# Altium PCB ScoreLED.PcbDoc (part 4 of 4)
Units mil, origin at the board's own origin, x right, y up, seen from the top; angles counter-clockwise.
Board outline 15000 x 7000 mil, 4 copper layers (Top Layer, Ground, Power, Bottom Layer); 605 components, 525 nets, 1780 pads, 554 vias.
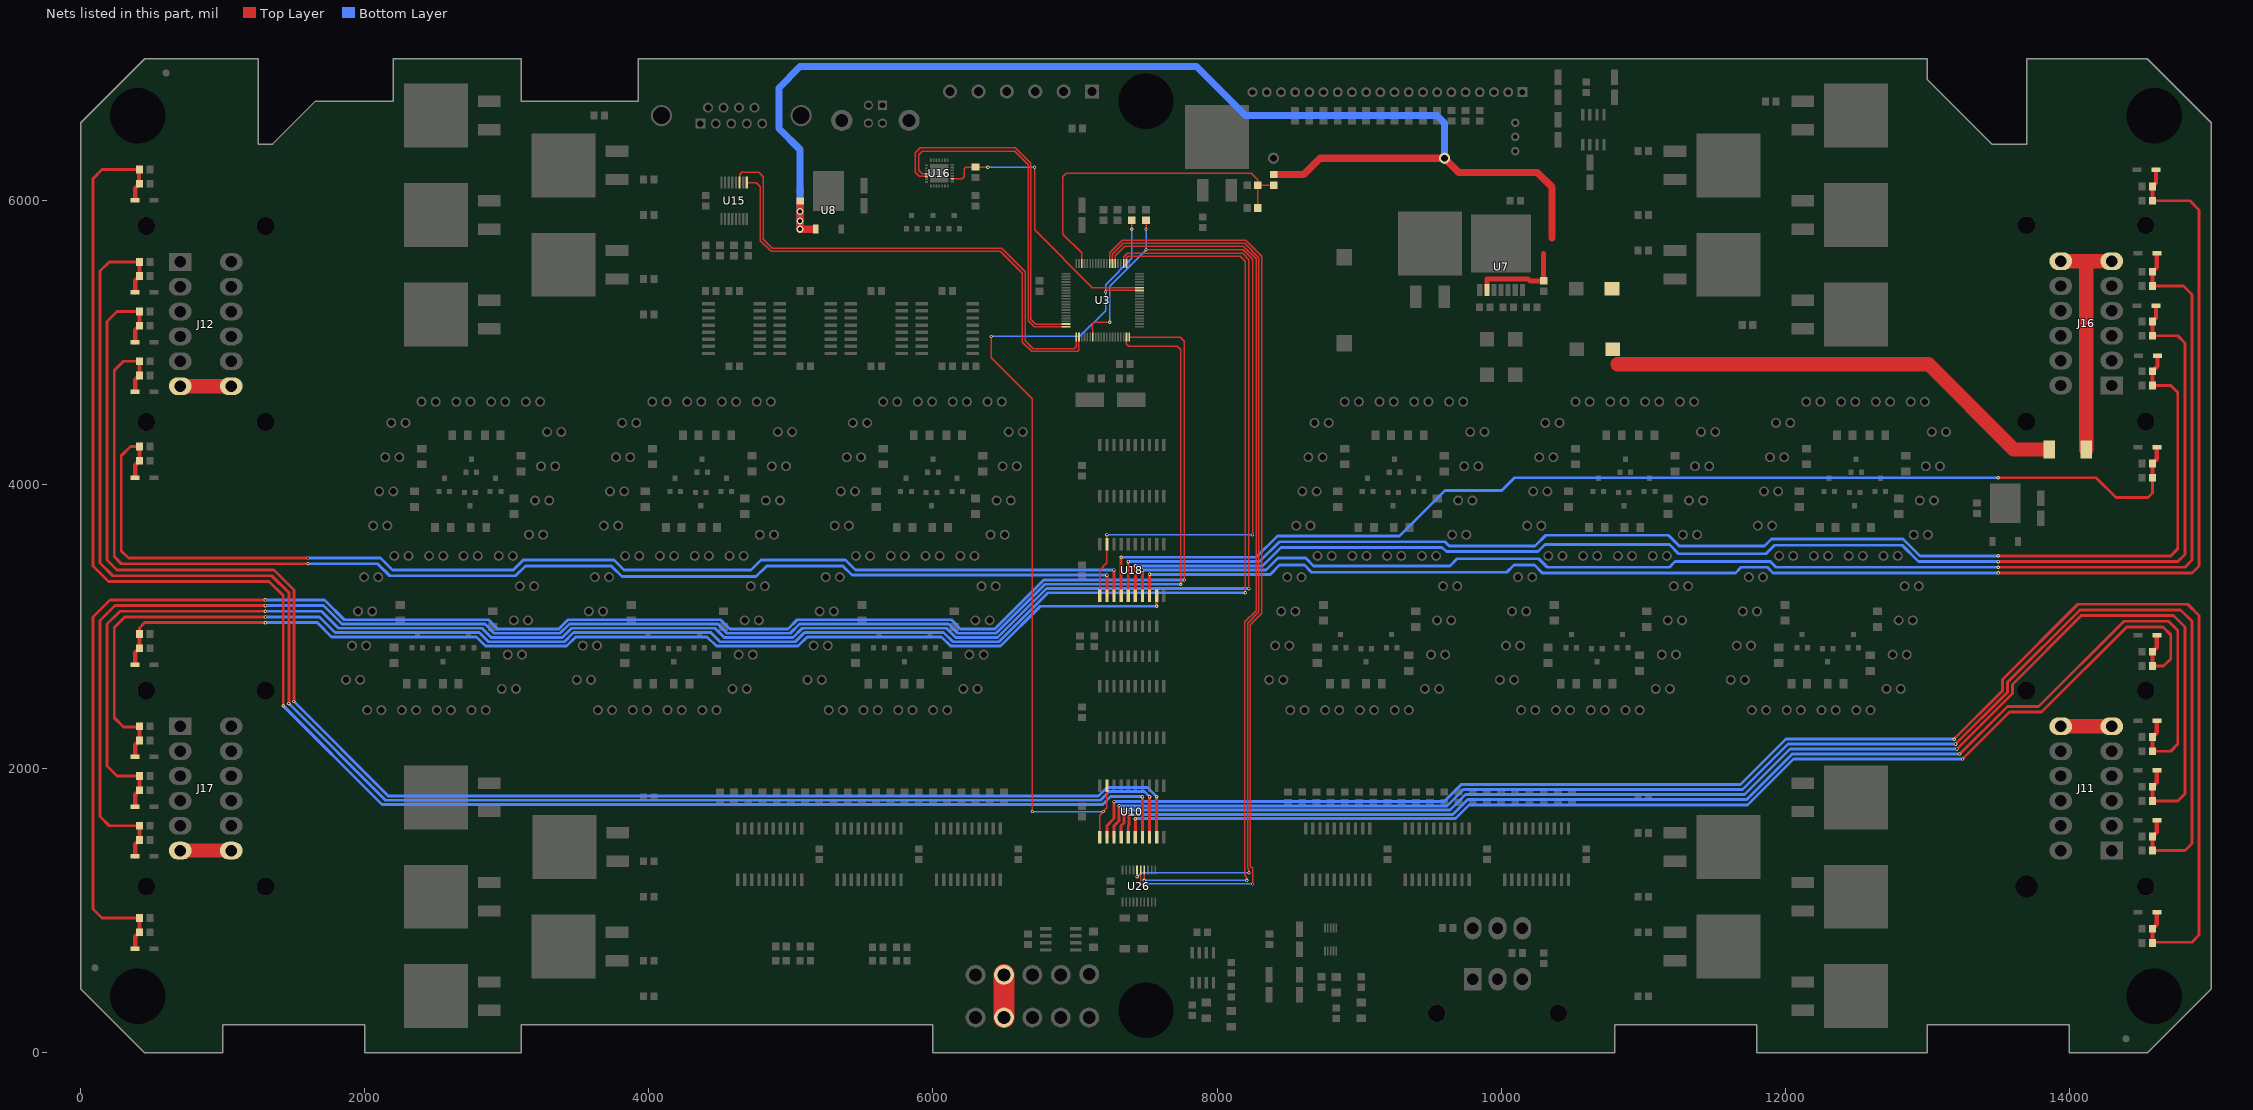
[diagram p6: the nets of this part, all layers, seen from the top]

## Via types
v1: diameter 24, hole 12, Top Layer to Bottom Layer, 468 vias
v2: diameter 50, hole 28, Top Layer to Bottom Layer, 86 vias

## Nets (pads, with @x,y where several pads share a name; then routed paths per layer and width w, separated by ;. In a path a pad name is that pad's centre, name@x,y a point inside that pad or via, vN(x,y) a via of type N, cw(c..) or ccw(c..) an arc to the next point about the centre after c; other vN are vias at no path point) (continued)
RTC_SCK: U3.6 U26.14 | length 6320.6
  Top Layer w10: U3.6@7283.58,5559.84 7283.58,5613.58 7351.25,5681.25 8186.25,5681.25 8275,5592.5 8275,3115 8195,3035 8195,1250 8210,1235 v1(8210,1215) ; v1(7488.39,1215) U26.14@7488.39,1287.2
  Bottom Layer w10: v1(7488.39,1215) v1(8210,1215)
RTC_SDI: U3.7 U26.16 | length 6384
  Top Layer w10: U3.7@7263.9,5559.84 7263.9,5624.21 7340.94,5701.25 8193.75,5701.25 8295,5600 8295,3105 8215,3025 8215,1305 8225,1295 v1(8225,1270) ; v1(7437.2,1240) U26.16@7437.2,1287.2
  Bottom Layer w10: v1(7437.2,1240) 7467.2,1270 v1(8225,1270)
RTC_SDO: U3.8 U26.15 | length 6571.1
  Top Layer w10: U3.8@7244.21,5559.84 7244.21,5634.21 7331.25,5721.25 8203.75,5721.25 8315,5610 8315,3095 8235,3015 8235,1315 8250,1300 v1(8250,1190) ; v1(7462.8,1190) U26.15@7462.8,1287.2
  Bottom Layer w10: v1(7462.8,1190) v1(8250,1190)
RXD_RS232: U3.42 U15.9 | length 3433
  Top Layer w10: U15.9@4689.57,6128.94 4756.06,6128.94 4785,6100 4785,5720 4860,5645 6475,5645 6630,5490 6630,5005 6695,4940 7020,4940 7027.68,4947.68 U3.42@7027.68,5040.16
RXD_USB: U3.39 U16.26 | length 2464.9
  Top Layer w10: U16.26@5954.45,6171.38 5903.62,6171.38 5875,6200 5875,6340 5910,6375 6580,6375 6690,6265 6690,5165 6722.32,5132.68 U3.39@6935.16,5132.68
SWITCH0: D3.2 R33.1 R34.1 U10.2 | length 11393.7
  Top Layer w20: U10.2@7225,1518.9 7225,1600 7275,1650 v1(7275,1770) ; v1(13190,2210) 13530,2550 13530,2630 14060,3160 14835,3160 14915,3080 14915,830 14865,780 R33.1@14587,780
  Top Layer w30: R33.1@14587,775 R34.1@14587,875 14616.93,904.93 D3.2@14616.93,990
  Bottom Layer w20: v1(7275,1770) 9600,1770 9720,1890 11685,1890 12005,2210 v1(13190,2210)
SWITCH1: D4.2 R35.1 R36.1 U10.3 | length 10527.5
  Top Layer w20: U10.3@7275,1518.9 7275,1600 7310,1635 v1(7310,1740) ; v1(13200,2175) 13565,2540 13565,2610 14075,3120 14785,3120 14865,3040 14865,1475 14815,1425 R35.1@14587,1425
  Top Layer w30: R35.1@14587,1425 R36.1@14587,1525 14616.93,1554.93 D4.2@14616.93,1640
  Bottom Layer w20: v1(7310,1740) 9620,1740 9735,1855 11700,1855 12020,2175 v1(13200,2175)
SWITCH2: D5.2 R37.1 R38.1 U10.4 | length 9959.2
  Top Layer w20: U10.4@7325,1518.9 7325,1600 7345,1620 7345,1680 v1(7345,1710) ; v1(13210,2140) 13600,2530 13600,2595 14085,3080 14735,3080 14815,3000 14815,1825 14765,1775 R37.1@14587,1775
  Top Layer w30: R37.1@14587,1775 R38.1@14587,1875 14616.93,1904.93 D5.2@14616.93,1990
  Bottom Layer w20: v1(7345,1710) 9640,1710 9750,1820 11715,1820 12035,2140 v1(13210,2140)
SWITCH3: D25.2 R39.1 R40.1 U10.5 | length 9364.5
  Top Layer w20: U10.5@7375,1518.9 7375,1600 7380,1605 7380,1635 v1(7380,1680) ; v1(13230,2105) 13565,2440 13785,2440 14385,3040 14700,3040 14765,2975 14765,2175 14715,2125 R39.1@14587,2125
  Top Layer w30: R39.1@14587,2125 R40.1@14587,2225 14616.93,2254.93 D25.2@14616.93,2340
  Bottom Layer w20: v1(7380,1680) 9660,1680 9765,1785 11730,1785 12050,2105 v1(13230,2105)
SWITCH4: D8.2 R41.1 R42.1 U10.6 | length 8544.2
  Top Layer w20: U10.6@7425,1518.9 v1@7425,1645 ; v1(13250,2070) 13580,2400 13805,2400 14405,3000 14660,3000 14715,2945 14715,2775 14665,2725 R41.1@14587,2725
  Top Layer w30: R41.1@14587,2725 R42.1@14587,2825 14616.93,2854.93 D8.2@14616.93,2940
  Bottom Layer w20: v1(7425,1650) 9680,1650 9775,1745 11735,1745 12060,2070 v1(13250,2070)
SWITCH5: D9.2 R43.1 R44.1 U10.7 | length 12153.1
  Top Layer w20: R43.1@413,6220 150,6220 85,6155 85,3430 195,3320 1325,3320 1425,3220 v1(1425,2445) ; U10.7@7475,1518.9 v1(7475,1805)
  Top Layer w30: D9.2@383.07,6005 383.07,6090.07 R44.1@413,6120 ; R44.1@410,6123 R43.1@410,6220
  Bottom Layer w20: v1(1425,2445) 2120,1750 7195,1750 7250,1805 v1(7475,1805)
SWITCH6: D10.2 R45.1 R46.1 U10.8 | length 11451.4
  Top Layer w20: R45.1@413,5570 200,5570 135,5505 135,3450 225,3360 1345,3360 1465,3240 v1(1465,2460) ; U10.8@7525,1518.9 v1(7525,1805)
  Top Layer w30: D10.2@383.07,5355 383.07,5440.07 R46.1@413,5470 R45.1@413,5570
  Bottom Layer w20: v1(1465,2460) 2145,1780 7180,1780 7240,1840 7490,1840 v1(7525,1805)
SWITCH7: D11.2 R47.1 R48.1 U10.9 | length 11039.7
  Top Layer w20: R47.1@413,5220 255,5220 185,5150 185,3470 255,3400 1360,3400 1500,3260 v1(1500,2475) ; U10.9@7575,1518.9 v1(7575,1805)
  Top Layer w30: D11.2@383.07,5005 383.07,5090.07 R48.1@413,5120 R47.1@413,5220
  Bottom Layer w20: v1(1500,2475) 2165,1810 7165,1810 7225,1870 7510,1870 v1(7575,1805)
SWITCH8: D6.2 R49.1 R50.1 U18.2 | length 9052.4
  Top Layer w20: R49.1@413,4870 300,4870 235,4805 235,3495 285,3445 v1(1600,3445) ; U18.2@7225,3218.9 v1(7225,3365)
  Top Layer w30: D6.2@383.07,4655 383.07,4740.07 R50.1@413,4770 R49.1@413,4870
  Bottom Layer w20: v1(1600,3445) 2090,3445 2175,3360 3060,3360 3130,3430 3735,3430 3810,3355 4755,3355 4830,3430 5365,3430 5430,3365 v1(7225,3365)
SWITCH9: D7.2 R51.1 R52.1 U18.3 | length 8400.3
  Top Layer w20: R51.1@413,4270 350,4270 285,4205 285,3535 335,3485 v1(1600,3485) ; U18.3@7275,3218.9 v1(7275,3400)
  Top Layer w30: D7.2@383.07,4050 383.07,4140.07 R52.1@413,4170 R51.1@413,4270
  Bottom Layer w20: v1(1600,3485) 2110,3485 2195,3400 3045,3400 3115,3470 3755,3470 3825,3400 4720,3400 4790,3470 5385,3470 5455,3400 v1(7275,3400)
SWITCH10: D15.2 R84.1 R85.1 U18.4 | length 8171.1
  Top Layer w20: U18.4@7325,3218.9 v1(7325,3490) ; v1(13500,4050) 14190,4050 14330,3910 14554,3910 14587,3943 R84.1@14587,4050
  Top Layer w30: R84.1@14587,4050 R85.1@14587,4150 14616.93,4179.93 D15.2@14616.93,4265
  Bottom Layer w20: v1(7325,3490) 8275,3490 8425,3640 9285,3640 9605,3960 10005,3960 10095,4050 v1(13500,4050)
SWITCH11: D16.2 R86.1 R87.1 U18.5 | length 9378
  Top Layer w20: U18.5@7375,3218.9 v1(7375,3460) ; v1(13500,3500) 14715,3500 14765,3550 14765,4650 14715,4700 R86.1@14587,4700
  Top Layer w30: R86.1@14587,4700 R87.1@14587,4800 14621.93,4834.93 D16.2@14621.93,4910
  Bottom Layer w20: v1(7375,3460) 8300,3460 8440,3600 9605,3600 9635,3570 10240,3570 10315,3645 11180,3645 11255,3570 11855,3570 11905,3620 12830,3620 12950,3500 v1(13500,3500)
SWITCH12: D17.2 R88.1 R89.1 U18.6 | length 9767.2
  Top Layer w20: U18.6@7425,3218.9 v1(7425,3430) ; v1(13500,3460) 14765,3460 14815,3510 14815,5000 14765,5050 R88.1@14587,5050
  Top Layer w30: R88.1@14587,5050 R89.1@14587,5150 14611.93,5174.93 D17.2@14611.93,5260
  Bottom Layer w20: v1(7425,3430) 8320,3430 8450,3560 9585,3560 9615,3530 10260,3530 10310,3580 11185,3580 11250,3515 11865,3515 11925,3575 12825,3575 12940,3460 v1(13500,3460)
SWITCH13: D18.2 R90.1 R91.1 U18.7 | length 10143.8
  Top Layer w20: U18.7@7475,3218.9 v1(7475,3400) ; v1(13500,3420) 14815,3420 14865,3470 14865,5340 14805,5400 R90.1@14587,5400
  Top Layer w30: R90.1@14587,5400 R91.1@14587,5500 14616.93,5529.93 D18.2@14616.93,5630
  Bottom Layer w20: v1(7475,3400) 8345,3400 8430,3485 8625,3485 8680,3430 9640,3430 9690,3480 10265,3480 10325,3420 11185,3420 11225,3460 11895,3460 11935,3420 v1(13500,3420)
SWITCH14: D19.2 R92.1 R93.1 U18.8 | length 10776.3
  Top Layer w20: U18.8@7525,3218.9 v1(7525,3370) ; v1(13500,3380) 14865,3380 14915,3430 14915,5935 14850,6000 R92.1@14587,6000
  Top Layer w30: R92.1@14587,6000 R93.1@14587,6100 14611.93,6124.93 D19.2@14611.93,6220
  Bottom Layer w20: v1(7525,3370) 8375,3370 8440,3435 8615,3435 8665,3385 10040,3385 10090,3435 10235,3435 10290,3380 11650,3380 11690,3420 11875,3420 11915,3380 v1(13500,3380)
SWITCH15: D20.2 R94.1 R95.1 U18.9 | length 7813.6
  Top Layer w20: R94.1@413,2950 413,2993 450,3030 v1(1300,3030) ; v1(7575,3145) U18.9@7575,3218.9
  Top Layer w30: D20.2@383.07,2735 383.07,2820.07 R95.1@413,2850 R94.1@413,2950
  Bottom Layer w20: v1(1300,3030) 1665,3030 1765,2930 2785,2930 2850,2865 3420,2865 3485,2930 4410,2930 4475,2865 5050,2865 5115,2930 6060,2930 6125,2865 6475,2865 6755,3145 v1(7575,3145)
SWITCH16: D21.2 R96.1 R97.1 U3.2 | length 12609.3
  Top Layer w10: U3.2@7362.32,5559.84 7362.32,5597.32 7375,5610 8165,5610 8200,5575 v1(8200,3240)
  Top Layer w20: R96.1@413,2295 300,2295 235,2360 235,2995 310,3070 v1(1300,3070)
  Top Layer w30: D21.2@383.07,2085 383.07,2170.07 R97.1@413,2200 R96.1@413,2300
  Bottom Layer w20: v1(1300,3070) 1680,3070 1790,2960 2805,2960 2870,2895 3405,2895 3470,2960 4435,2960 4500,2895 5030,2895 5090,2955 ; 5095,2960 6075,2960 6140,2895 6465,2895 6810,3240 v1(8200,3240)
SWITCH17: D22.2 R98.1 R99.1 U3.3 | length 13160.5
  Top Layer w10: U3.3@7342.64,5559.84 7342.64,5605.14 7367.5,5630 8180,5630 8225,5585 v1(8225,3270)
  Top Layer w20: R98.1@413,1950 255,1950 185,2020 185,3020 275,3110 v1(1300,3110)
  Top Layer w30: D22.2@383.07,1735 383.07,1820.07 R99.1@413,1850 R98.1@413,1950
  Bottom Layer w20: v1(1300,3110) 1695,3110 1815,2990 2825,2990 2890,2925 3390,2925 3455,2990 4465,2990 4530,2925 5015,2925 5080,2990 6095,2990 6160,2925 6455,2925 6800,3270 v1(8225,3270)
SWITCH18: D23.2 R100.1 R101.1 U3.59 | length 11995
  Top Layer w10: U3.59@7362.32,5040.16 7362.32,4992.68 7380,4975 7720,4975 7745,4950 v1(7745,3300)
  Top Layer w20: R100.1@413,1600 200,1600 135,1665 135,3045 240,3150 v1(1300,3150)
  Top Layer w30: D23.2@383.07,1385 383.07,1470.07 R101.1@413,1500 R100.1@413,1600
  Bottom Layer w20: v1(1300,3150) 1710,3150 1840,3020 2845,3020 2910,2955 3375,2955 3440,3020 4485,3020 4550,2955 4995,2955 5060,3020 6110,3020 6175,2955 6445,2955 6790,3300 v1(7745,3300)
SWITCH19: D24.2 R102.1 R103.1 U3.60 | length 12788
  Top Layer w10: U3.60@7382.01,5040.16 7739.84,5040.16 7770,5010 v1(7770,3330)
  Top Layer w20: R102.1@413,950 150,950 85,1015 85,3070 205,3190 v1(1300,3190)
  Top Layer w30: D24.2@383.07,735 383.07,820.07 R103.1@413,850 R102.1@413,950
  Bottom Layer w20: v1(1300,3190) 1715,3190 1855,3050 2870,3050 2935,2985 3365,2985 3430,3050 4505,3050 4570,2985 4980,2985 5045,3050 6130,3050 6195,2985 6435,2985 6780,3330 v1(7770,3330)
SWITCHES0-7: R55.2 U3.74 U10.1 U10.19 | length 6185.8
  Top Layer w10: v1(6410,5045) 6410,4895 6700,4605 v1(6700,1700) ; U10.1@7175,1518.9 7175,1675 7225,1725 U10.19@7225,1881.1 ; v1(7215,5360) 7223.9,5368.9 U3.74@7454.84,5368.9 ; v1(7400,5800) R55.2@7400,5863
  Bottom Layer w10: v1(6410,5045) 7035,5045 7215,5225 7215,5410 7400,5595 v1(7400,5800) ; v1(6700,1700) v1(7200,1700)
SWITCHES8-15: R104.2 U3.47 U18.1 U18.19 | length 5240.9
  Top Layer w10: U3.47@7126.1,5040.16 7126.1,5093.9 7120,5100 7120,5130 7135,5145 v1(7245,5145) ; U18.1@7175,3218.9 7175,3400 7225,3450 v1(7225,3650) ; v1(7500,5655) 8185,5655 8250,5590 v1(8250,3650) ; v1(7500,5800) R104.2@7500,5863
  Bottom Layer w10: v1(7225,3650) v1(8250,3650) ; v1(7245,5145) 7245,5400 v1(7500,5655) v1(7500,5800)
TXD_RS233: U3.41 U15.11 | length 3559
  Top Layer w10: U15.11@4638.39,6128.94 4638.39,6183.39 4655,6200 4775,6200 4805,6170 4805,5730 4870,5665 6485,5665 6650,5500 6650,5015 6705,4960 6995,4960 7007.99,4972.99 U3.41@7007.99,5040.16
TXD_USB: U3.40 U16.25 | length 2376.6
  Top Layer w10: U16.25@5954.45,6191.06 5923.94,6191.06 5900,6215 5900,6325 5925,6350 6575,6350 6670,6255 6670,5155 6712.01,5112.99 U3.40@6935.16,5112.99
USB_RST: R82.1 U3.75 U16.9 | length 1993.6
  Top Layer w10: U16.9@6135.55,6155.63 6205.63,6155.63 6220,6170 6220,6225 6232,6237 v1(6387,6237) ; v1@6715,6235 6715,5795 7121.42,5388.58 U3.75@7454.84,5388.58
  Bottom Layer w10: v1(6387,6237) v1(6715,6237)
VBAT: D1.A J2.1 J6.1 J11.6 J11.7 J12.6 J12.7 J16.6 J16.7 J17.6 J17.7 | length 3057
  Top Layer w100: J17.6@700,1425 J17.7@1059,1425 ; J12.6@700,4695 J12.7@1060,4695 ; J11.7@13941,2300 J11.6@14300,2300 ; J16.7@13941,5575 J16.6@14300,5575 ; D1.A@14120,4250 14120,5570
  Top Layer w150: J2.1@6500,250 J6.1@6500,550
VIN: C8.1 C9.1 C11.1 C17.1 D1.K R56.2 R67.1 U7.2 U8.1 | length 12919.2
  Top Layer w35: U7.2@9900,5372 9900,5450 10190,5450 10203,5437 C11.1@10300,5437 10300,5630
  Top Layer w50: C17.1@5065,5998 v2(5065.16,5800.16) U8.1@5165,5800.16 ; R56.2@8400,6184 8609,6184 8725,6300 R67.1@9602.36,6300 9702.36,6200 10255,6200 10360,6095 10360,5740
  Top Layer w100: 10820,4850 13010,4850 13610,4250 D1.K@13850,4250
  Bottom Layer w50: v2(5065.16,5800.16) 5065.16,6359.84 4915,6510 4915,6795 5065,6945 7855,6945 8200,6600 9549.72,6600 9602.36,6547.36 R67.1@9602.36,6300
  other v2: 5065.11,5859.14 5065.06,5924.14
VIN_SENSE_ANALOG: C31.1 R56.1 R57.2 U3.18 | length 2377.8
  Top Layer w10: U3.18@7047.36,5559.84 7047.36,5632.64 6915,5765 6915,6170 6940,6195 8240,6195 8287,6148 C31.1@8287,5950 ; R57.2@8287,6110 R56.1@8400,6110
pads on no net: D2.1 D12.2 D13.2 D14.2 FID1.1 FID2.1 FID3.1 J11.0 J12.0 J13.6 J14.0 J15.1 J15.4 J15.6 J15.7 J15.8 J15.9 J16.0 J17.0 J18.18 J19.0 J19.2 J19.5 M1.0 M2.0 M3.0 M4.0 M5.0 M6.0 U2.3 U2.4 U2.5 U2.6 U2.11 U2.12 U2.13 U2.14 U3.4 U3.5 U3.16 U4.7 U5.5 U6.3 U6.4 U6.5 U6.6 U6.11 U6.12 U6.13 U6.14 U7.5 U7.8 U9.3 U9.4 U9.5 U9.6 U9.11 U9.12 U9.13 U9.14 U13.3 U13.4 U13.5 U13.6 U13.11 U13.12 U13.13 U13.14 U14.12 U16.0 U16.1 U16.2 U16.10 U16.11 U16.12 U16.13 U16.14 U16.15 U16.16 U16.17 U16.18 U16.19 U16.20 U16.21 U16.22 U16.23 U16.24 U16.27 U16.28 U17.1 U17.6 U17.7 U26.4 U26.6 U26.7 U26.8 U26.9 U26.13 U26.18 U26.19 Y2.0 Y2.2 Y2.3

## Polygon pours and split planes (outlines as drawn)
"+3.3 VDC" on Top Layer "3.3VDC" (solid, remove dead copper, pour order 1001): 5300,5870 5300,5735 5600,5735 5600,6035 5455,6035 5455,5870
GND on Top Layer "3.3VDC GND" (solid, remove dead copper, pour order 1000): 5100,6300 5100,5870 5450,5870 5450,6300
"+8 VDC" on Top Layer "8 VDC" (solid, remove dead copper, pour order 1001): 8700,5250 8700,4650 10300,4650 10300,4900 10290,4900 10250,4900 10215,4900 9200,4900 9200,5250
NetC15_2 on Top Layer "C15_2" (solid, remove dead copper, pour order 1002): 8700,5250 8700,5800 8900,6000 9750,6000 9750,5415 9200,5415 9200,5250
GND on Top Layer "GND" (solid, remove dead copper, pour order 1003): 9200,5400 9200,4900 10300,4900 10300,4650 10650,4650 10650,5600 10350,5600 10350,5400 9800,5400 9500,5400
VIN on Top Layer "Vin" (solid, remove dead copper, pour order 1004): 10650,4650 11000,4650 11000,5600 10825,5600 10825,5750 10775,5800 10260,5800 10260,5600 10350,5600 10650,5600
VBAT on Bottom Layer "Vbat" (solid, remove dead copper, pour order 1000): 0,7000 0,0 15000,0 15000,7000 13800,7000 13800,800 1200,800 1200,7000
no net on Power (split plane): 11789.55,6554.33 11160.45,6554.33 11336.79,6730.67 11613.21,6730.67
no net on Power (split plane): 6595.67,6424.33 6009.33,6424.33 6009.33,6545.67 6595.67,6545.67
"+3.3 VDC" on Power (split plane): 14979.61,6541.55 14979.61,458.45 14541.55,20.39 14020.39,20.39 14020.39,200 14018.84,207.8 14014.42,214.42 14007.8,218.84 14000,220.39 13000,220.39 12992.2,218.84 12985.58,214.42 12981.16,207.8 12979.61,200 12979.61,20.39 11820.39,20.39 11820.39,200 11818.84,207.8 11814.42,214.42 11807.8,218.84 11800,220.39 10800,220.39 10792.2,218.84 10785.58,214.42 10781.16,207.8 10779.61,200 10779.61,20.39 6020.39,20.39 6020.39,200 6018.84,207.8 6014.42,214.42 6007.8,218.84 6000,220.39 3100,220.39 3092.2,218.84 3085.58,214.42 3081.16,207.8 3079.61,200 3079.61,20.39 2020.39,20.39 2020.39,200 2018.84,207.8 2014.42,214.42 2007.8,218.84 2000,220.39 1000,220.39 992.2,218.84 985.58,214.42 981.16,207.8 979.61,200 979.61,20.39 458.45,20.39 20.39,458.45 20.39,6541.55 458.45,6979.61 1229.61,6979.61 1229.61,6400 1231.16,6392.2 1235.58,6385.58 1242.2,6381.16 1250,6379.61 1350,6379.61 1357.8,6381.16 1364.42,6385.58 1658.45,6679.61 2200,6679.61 2207.8,6681.16 2214.42,6685.58 2218.84,6692.2 2220.39,6700 2220.39,6979.61 3079.61,6979.61 3079.61,6700 3081.16,6692.2 3085.58,6685.58 3092.2,6681.16 3100,6679.61 3925,6679.61 3932.8,6681.16 3939.42,6685.58 3943.84,6692.2 3945.39,6700 3945.39,6979.61 12979.61,6979.61 12979.61,6855 12981.16,6847.2 12985.58,6840.58 13440.58,6385.58 13447.2,6381.16 13455,6379.61 13700,6379.61 13707.8,6381.16 13714.42,6385.58 13718.84,6392.2 13720.39,6400 13720.39,6979.61 14541.55,6979.61
no net on Power (split plane): 7695.67,6254.33 6819.33,6254.33 6819.33,6445.67 7695.67,6445.67
no net on Power (split plane): 1654.33,6010.45 1654.33,6345.67 1989.55,6345.67
no net on Power (split plane): 11010.67,6116.79 10848.21,5954.33 10610.45,5954.33 10906.79,6250.67 11010.67,6250.67
no net on Power (split plane): 11275.67,5949.33 11139.33,5949.33 11139.33,6065.67 11275.67,6065.67
no net on Power (split plane): 6595.67,5804.33 6454.33,5804.33 6454.33,6145.67 6595.67,6145.67
no net on Power (split plane): 11295.67,5250 11296.94,5246.94 11300,5245.67 11595.67,5245.67 11595.67,4954.33 11054.33,4954.33 11054.33,5340.67 11295.67,5340.67
no net on Power (split plane): 11984.07,4710.2 11766.32,4710.2 11801.79,4745.67 12019.55,4745.67
no net on Power (split plane): 8435.67,4710.2 8364.33,4710.2 8364.33,4745.67 8435.67,4745.67
no net on Power (split plane): 3995.67,4756.79 3949.07,4710.2 3395.93,4710.2 3303.06,4803.06 3300,4804.33 3104.33,4804.33 3104.33,5095.67 3995.67,5095.67
no net on Power (split plane): 2245.67,4654.33 1810.2,4654.33 1810.2,4689.8 2245.67,4689.8
no net on Power (split plane): 2245.67,4948.21 2245.67,4710.2 1800,4710.2 1796.1,4709.42 1792.79,4707.21 1790.58,4703.9 1789.8,4700 1789.8,4654.33 1654.33,4654.33 1654.33,4848.21 1851.79,5045.67 2148.21,5045.67
no net on Power (split plane): 5495.67,4604.33 5004.33,4604.33 5004.33,4689.8 5495.67,4689.8
no net on Power (split plane): 3843.21,4604.33 3501.79,4604.33 3416.32,4689.8 3928.68,4689.8
"+8 VDC" on Power (split plane): 6789.8,2310.2 1810.2,2310.2 1810.2,4645.67 2250,4645.67 2253.06,4646.94 2254.33,4650 2254.33,4689.8 3404.07,4689.8 3496.94,4596.94 3500,4595.67 3845,4595.67 3848.06,4596.94 3940.93,4689.8 4995.67,4689.8 4995.67,4600 4996.94,4596.94 5000,4595.67 5500,4595.67 5503.06,4596.94 5504.33,4600 5504.33,4689.8 6789.8,4689.8
no net on Power (split plane): 11828.21,4554.33 11610.45,4554.33 11745.93,4689.8 11963.68,4689.8
no net on Power (split plane): 8435.67,4479.33 8364.33,4479.33 8364.33,4689.8 8435.67,4689.8
"+8 VDC" on Power (split plane): 10289.8,4700 10290.58,4696.1 10292.79,4692.79 10296.1,4690.58 10300,4689.8 11733.68,4689.8 11596.94,4553.06 11595.67,4550 11596.94,4546.94 11600,4545.67 11830,4545.67 11833.06,4546.94 11975.93,4689.8 13189.8,4689.8 13189.8,3759.33 13125,3759.33 13121.94,3758.06 13120.67,3755 13120.67,3580 13121.94,3576.94 13125,3575.67 13189.8,3575.67 13189.8,2310.2 12954.33,2310.2 12954.33,2400 12953.06,2403.06 12950,2404.33 12750,2404.33 12746.94,2403.06 12745.67,2400 12745.67,2310.2 11704.33,2310.2 11704.33,2350 11703.06,2353.06 11700,2354.33 11650,2354.33 11646.94,2353.06 11604.07,2310.2 8210.2,2310.2 8210.2,4689.8 8355.67,4689.8 8355.67,4475 8356.94,4471.94 8360,4470.67 8440,4470.67 8443.06,4471.94 8444.33,4475 8444.33,4689.8 8600,4689.8 8603.9,4690.58 8607.21,4692.79 8609.42,4696.1 8610.2,4700 8610.2,4889.8 10289.8,4889.8
no net on Power (split plane): 7595.67,4394.33 7061.79,4394.33 7010.45,4445.67 7595.67,4445.67
no net on Power (split plane): 10190.67,4359.33 9989.33,4359.33 9989.33,4445 9988.06,4448.06 9879.33,4556.79 9879.33,4595.67 10190.67,4595.67
no net on Power (split plane): 10665.67,4304.33 10621.79,4304.33 10539.33,4386.79 10539.33,4440.67 10665.67,4440.67
no net on Power (split plane): 9040.67,4304.33 8986.79,4304.33 8904.33,4386.79 8904.33,4450.67 9040.67,4450.67
no net on Power (split plane): 12295.67,4274.33 12229.33,4274.33 12229.33,4330 12228.06,4333.06 12154.33,4406.79 12154.33,4435.67 12295.67,4435.67
no net on Power (split plane): 13430.67,4233.21 13430.67,4174.33 13239.33,4174.33 13239.33,4345.67 13318.21,4345.67
no net on Power (split plane): 8865.67,3689.33 8759.33,3689.33 8759.33,3770.67 8865.67,3770.67
no net on Power (split plane): 5615.67,3676.79 5598.21,3659.33 5504.33,3659.33 5504.33,3775.67 5615.67,3775.67
no net on Power (split plane): 2395.67,3589.33 2351.79,3589.33 2304.33,3636.79 2304.33,3695.67 2395.67,3695.67
no net on Power (split plane): 13275.67,3663.21 13275.67,3584.33 13210.2,3584.33 13210.2,3728.68
no net on Power (split plane): 13189.8,3749.07 13189.8,3584.33 13129.33,3584.33 13129.33,3750.67 13188.21,3750.67
no net on Power (split plane): 3595.67,3584.33 3454.33,3584.33 3454.33,3635.67 3595.67,3635.67
no net on Power (split plane): 1695.67,3554.33 1254.33,3554.33 1254.33,3895.67 1695.67,3895.67
no net on Power (split plane): 5855.67,3254.33 5720,3254.33 5716.94,3253.06 5656.94,3193.06 5655.67,3190 5655.67,3104.33 5604.33,3104.33 5604.33,3295.67 5855.67,3295.67
no net on Power (split plane): 4045.67,3104.33 3959.33,3104.33 3959.33,3240.67 4045.67,3240.67
no net on Power (split plane): 2435.67,3104.33 2344.33,3104.33 2344.33,3260.67 2435.67,3260.67
no net on Power (split plane): 12545.67,3004.33 12404.33,3004.33 12404.33,3145.67 12545.67,3145.67
no net on Power (split plane): 12150.67,3004.33 12089.33,3004.33 12089.33,3195.67 12150.67,3195.67
no net on Power (split plane): 10945.67,3004.33 10754.33,3004.33 10754.33,3078.21 10801.79,3125.67 10945.67,3125.67
no net on Power (split plane): 10545.67,3004.33 10454.33,3004.33 10454.33,3195.67 10545.67,3195.67
no net on Power (split plane): 9295.67,3004.33 9154.33,3004.33 9154.33,3125.67 9295.67,3125.67
no net on Power (split plane): 8920.67,3004.33 8854.33,3004.33 8854.33,3195.67 8920.67,3195.67
no net on Power (split plane): 8695.67,2569.33 8559.33,2569.33 8559.33,2680.67 8695.67,2680.67
no net on Power (split plane): 3830.67,2569.33 3704.33,2569.33 3704.33,2660.67 3830.67,2660.67
no net on Power (split plane): 5455.67,2559.33 5329.33,2559.33 5329.33,2655.67 5455.67,2655.67
no net on Power (split plane): 2205.67,2559.33 2064.33,2559.33 2064.33,2680.67 2205.67,2680.67
no net on Power (split plane): 11945.67,2554.33 11854.33,2554.33 11854.33,2645.67 11945.67,2645.67
no net on Power (split plane): 10345.67,2554.33 10204.33,2554.33 10204.33,2645.67 10345.67,2645.67
no net on Power (split plane): 11198.21,2354.33 11104.33,2354.33 11104.33,2415.67 11259.55,2415.67
no net on Power (split plane): 13645.67,3104.33 13400,3104.33 13396.94,3103.06 13395.67,3100 13395.67,2501.79 13210.2,2316.32 13210.2,3295.67 13645.67,3295.67
no net on Power (split plane): 12945.67,2310.2 12754.33,2310.2 12754.33,2395.67 12945.67,2395.67
no net on Power (split plane): 11695.67,2310.2 11616.32,2310.2 11651.79,2345.67 11695.67,2345.67
no net on Power (split plane): 12945.67,2254.33 12754.33,2254.33 12754.33,2289.8 12945.67,2289.8
no net on Power (split plane): 11695.67,2154.33 11460.45,2154.33 11595.93,2289.8 11695.67,2289.8
no net on Power (split plane): 2190.67,1945.45 1960.45,2175.67 2190.67,2175.67
no net on Power (split plane): 13155.67,1904.33 12834.33,1904.33 12834.33,2015.67 13155.67,2015.67
no net on Power (split plane): 3249.55,1904.33 3131.79,1904.33 2943.06,2093.06 2940,2094.33 2504.33,2094.33 2504.33,2165.67 2988.21,2165.67
no net on Power (split plane): 8410.67,1839.33 8294.33,1839.33 8294.33,2060.67 8410.67,2060.67
no net on Power (split plane): 13033.21,1554.33 12839.33,1554.33 12839.33,1695.67 13174.55,1695.67
no net on Power (split plane): 10850.67,1601.79 10763.21,1514.33 10696.79,1514.33 10643.06,1568.06 10640,1569.33 10584.33,1569.33 10584.33,1645.67 10850.67,1645.67
no net on Power (split plane): 11015.67,1249.33 10864.33,1249.33 10864.33,1435.67 11015.67,1435.67
no net on Power (split plane): 12973.21,1204.33 12834.33,1204.33 12834.33,1345.67 13114.55,1345.67
no net on Power (split plane): 10640.67,974.33 10504.33,974.33 10504.33,1125.67 10640.67,1125.67
no net on Power (split plane): 2096.94,996.94 2100,995.67 2195.67,995.67 2195.67,864.33 2041.79,864.33 1904.33,1001.79 1904.33,1189.55
no net on Power (split plane): 4545.67,1160 4546.94,1156.94 4795.67,908.21 4795.67,854.33 4304.33,854.33 4304.33,1595 4304.05,1595.67 4545.67,1595.67
GND on Ground (split plane): 11789.55,6554.33 11160.45,6554.33 11336.79,6730.67 11613.21,6730.67
GND on Ground (split plane): 6595.67,6424.33 6009.33,6424.33 6009.33,6545.67 6595.67,6545.67
GND on Ground (split plane): 152 vertices, not listed, extent 20.39,20.39 14979.61,6979.61
GND on Ground (split plane): 7695.67,6254.33 6819.33,6254.33 6819.33,6445.67 7695.67,6445.67
GND on Ground (split plane): 1654.33,6010.45 1654.33,6345.67 1989.55,6345.67
GND on Ground (split plane): 11010.67,6116.79 10848.21,5954.33 10610.45,5954.33 10906.79,6250.67 11010.67,6250.67
GND on Ground (split plane): 11275.67,5949.33 11139.33,5949.33 11139.33,6065.67 11275.67,6065.67
GND on Ground (split plane): 6595.67,5804.33 6454.33,5804.33 6454.33,6145.67 6595.67,6145.67
GND on Ground (split plane): 11295.67,5250 11296.94,5246.94 11300,5245.67 11595.67,5245.67 11595.67,4954.33 11054.33,4954.33 11054.33,5340.67 11295.67,5340.67
GND on Ground (split plane): 2245.67,4948.21 2245.67,4654.33 1654.33,4654.33 1654.33,4848.21 1851.79,5045.67 2148.21,5045.67
GND on Ground (split plane): 5495.67,4604.33 5004.33,4604.33 5004.33,4695.67 5495.67,4695.67
GND on Ground (split plane): 3995.67,4756.79 3843.21,4604.33 3501.79,4604.33 3303.06,4803.06 3300,4804.33 3104.33,4804.33 3104.33,5095.67 3995.67,5095.67
GND on Ground (split plane): 11828.21,4554.33 11610.45,4554.33 11801.79,4745.67 12019.55,4745.67
GND on Ground (split plane): 8435.67,4479.33 8364.33,4479.33 8364.33,4745.67 8435.67,4745.67
GND on Ground (split plane): 7595.67,4394.33 7110.2,4394.33 7110.2,4445.67 7595.67,4445.67
GND on Ground (split plane): 7089.8,4394.33 7061.79,4394.33 7010.45,4445.67 7089.8,4445.67
GND on Ground (split plane): 10190.67,4359.33 9989.33,4359.33 9989.33,4445 9988.06,4448.06 9879.33,4556.79 9879.33,4595.67 10190.67,4595.67
GND on Ground (split plane): 10665.67,4304.33 10621.79,4304.33 10539.33,4386.79 10539.33,4440.67 10665.67,4440.67
GND on Ground (split plane): 9040.67,4304.33 8986.79,4304.33 8904.33,4386.79 8904.33,4450.67 9040.67,4450.67
GND on Ground (split plane): 12295.67,4274.33 12229.33,4274.33 12229.33,4330 12228.06,4333.06 12154.33,4406.79 12154.33,4435.67 12295.67,4435.67
GND on Ground (split plane): 13430.67,4233.21 13430.67,4174.33 13239.33,4174.33 13239.33,4345.67 13318.21,4345.67
GND on Ground (split plane): 8865.67,3689.33 8759.33,3689.33 8759.33,3770.67 8865.67,3770.67
GND on Ground (split plane): 5615.67,3676.79 5598.21,3659.33 5504.33,3659.33 5504.33,3775.67 5615.67,3775.67
GND on Ground (split plane): 2395.67,3589.33 2351.79,3589.33 2304.33,3636.79 2304.33,3695.67 2395.67,3695.67
GND on Ground (split plane): 13275.67,3663.21 13275.67,3584.33 13129.33,3584.33 13129.33,3750.67 13188.21,3750.67
GND on Ground (split plane): 3595.67,3584.33 3454.33,3584.33 3454.33,3635.67 3595.67,3635.67
GND on Ground (split plane): 1695.67,3554.33 1254.33,3554.33 1254.33,3895.67 1695.67,3895.67
GND on Ground (split plane): 5855.67,3254.33 5720,3254.33 5716.94,3253.06 5656.94,3193.06 5655.67,3190 5655.67,3104.33 5604.33,3104.33 5604.33,3295.67 5855.67,3295.67
GND on Ground (split plane): 4045.67,3104.33 3959.33,3104.33 3959.33,3240.67 4045.67,3240.67
GND on Ground (split plane): 2435.67,3104.33 2344.33,3104.33 2344.33,3260.67 2435.67,3260.67
GND on Ground (split plane): 12545.67,3004.33 12404.33,3004.33 12404.33,3145.67 12545.67,3145.67
GND on Ground (split plane): 12150.67,3004.33 12089.33,3004.33 12089.33,3195.67 12150.67,3195.67
GND on Ground (split plane): 10945.67,3004.33 10754.33,3004.33 10754.33,3078.21 10801.79,3125.67 10945.67,3125.67
GND on Ground (split plane): 10545.67,3004.33 10454.33,3004.33 10454.33,3195.67 10545.67,3195.67
GND on Ground (split plane): 9295.67,3004.33 9154.33,3004.33 9154.33,3125.67 9295.67,3125.67
GND on Ground (split plane): 8920.67,3004.33 8854.33,3004.33 8854.33,3195.67 8920.67,3195.67
GND on Ground (split plane): 8695.67,2569.33 8559.33,2569.33 8559.33,2680.67 8695.67,2680.67
GND on Ground (split plane): 3830.67,2569.33 3704.33,2569.33 3704.33,2660.67 3830.67,2660.67
GND on Ground (split plane): 5455.67,2559.33 5329.33,2559.33 5329.33,2655.67 5455.67,2655.67
GND on Ground (split plane): 2205.67,2559.33 2064.33,2559.33 2064.33,2680.67 2205.67,2680.67
GND on Ground (split plane): 11945.67,2554.33 11854.33,2554.33 11854.33,2645.67 11945.67,2645.67
GND on Ground (split plane): 10345.67,2554.33 10204.33,2554.33 10204.33,2645.67 10345.67,2645.67
GND on Ground (split plane): 11198.21,2354.33 11104.33,2354.33 11104.33,2415.67 11259.55,2415.67
GND on Ground (split plane): 13645.67,3104.33 13400,3104.33 13396.94,3103.06 13395.67,3100 13395.67,2501.79 13204.33,2310.45 13204.33,2350 13204.33,3295.67 13645.67,3295.67
GND on Ground (split plane): 12945.67,2254.33 12754.33,2254.33 12754.33,2395.67 12945.67,2395.67
GND on Ground (split plane): 11695.67,2154.33 11460.45,2154.33 11651.79,2345.67 11695.67,2345.67
GND on Ground (split plane): 2190.67,1945.45 1960.45,2175.67 2190.67,2175.67
GND on Ground (split plane): 13155.67,1904.33 12834.33,1904.33 12834.33,2015.67 13155.67,2015.67
GND on Ground (split plane): 3249.55,1904.33 3131.79,1904.33 2943.06,2093.06 2940,2094.33 2504.33,2094.33 2504.33,2165.67 2988.21,2165.67
GND on Ground (split plane): 8410.67,1839.33 8294.33,1839.33 8294.33,2060.67 8410.67,2060.67
GND on Ground (split plane): 13033.21,1554.33 12839.33,1554.33 12839.33,1695.67 13174.55,1695.67
GND on Ground (split plane): 10850.67,1601.79 10763.21,1514.33 10696.79,1514.33 10643.06,1568.06 10640,1569.33 10584.33,1569.33 10584.33,1645.67 10850.67,1645.67
GND on Ground (split plane): 11015.67,1249.33 10864.33,1249.33 10864.33,1435.67 11015.67,1435.67
GND on Ground (split plane): 12973.21,1204.33 12834.33,1204.33 12834.33,1345.67 13114.55,1345.67
GND on Ground (split plane): 10640.67,974.33 10504.33,974.33 10504.33,1125.67 10640.67,1125.67
GND on Ground (split plane): 2096.94,996.94 2100,995.67 2195.67,995.67 2195.67,864.33 2041.79,864.33 1904.33,1001.79 1904.33,1189.55
GND on Ground (split plane): 4545.67,1160 4546.94,1156.94 4795.67,908.21 4795.67,854.33 4304.33,854.33 4304.33,1595 4304.05,1595.67 4545.67,1595.67

## Keep-outs
Keep-Out Layer:
  lines w8: 4300,1595 4300,850 4800,850 4800,910 4550,1160 4550,1600 4300,1600 ; 9875,4600 10195,4600 10195,4355 9985,4355 9985,4445 9875,4555 9875,4605 ; 0,450 450,0 1000,0 1000,200 2000,200 2000,0 3100,0 3100,200 6000,200 6000,0 10800,0 10800,200 11800,200 11800,0 13000,0 13000,200 14000,200 14000,0 14550,0 15000,450 15000,6550 14550,7000 13700,7000 13700,6400 13455,6400 13000,6855 13000,7000 3925,7000 3925,6700 3100,6700 3100,7000 2200,7000 2200,6700 1650,6700 1350,6400 1250,6400 1250,7000 450,7000 0,6550 0,450 ; 1250,3550 1700,3550 1700,3900 1250,3900 1250,3550 ; 1650,4650 1650,4850 1850,5050 2150,5050 2250,4950 2250,4650 1650,4650 ; 1650,6000 2000,6350 1650,6350 1650,6000 ; 1900,1000 1900,1200 2100,1000 2200,1000 2200,860 2040,860 1900,1000 ; 1950,2180 2000,2180 2195,2180 2195,1935 1950,2180 ; 2060,2555 2210,2555 2210,2685 2060,2685 2060,2555 ; 2300,3635 2350,3585 2400,3585 2400,3700 2300,3700 2300,3635 ; 2340,3100 2440,3100 2440,3265 2340,3265 2340,3100 ; 2500,2090 2940,2090 3130,1900 3260,1900 2990,2170 2500,2170 2500,2090 ; 3100,4800 3300,4800 3500,4600 3845,4600 4000,4755 4000,5100 3100,5100 3100,4800 ; 3450,3580 3600,3580 3600,3640 3450,3640 3450,3580 ; 3700,2565 3835,2565 3835,2665 3700,2665 3700,2565 ; 3955,3100 4050,3100 4050,3245 3955,3245 3955,3100 ; 5000,4600 5500,4600 5500,4700 5000,4700 5000,4600 ; 5325,2555 5460,2555 5460,2660 5325,2660 5325,2555 ; 5500,3655 5600,3655 5620,3675 5620,3780 5500,3780 5500,3655 ; 5600,3100 5660,3100 5660,3190 5720,3250 5860,3250 5860,3300 5600,3300 5600,3100 ; 6450,5800 6600,5800 6600,6150 6450,6150 6450,5800 ; 6815,6250 7700,6250 7700,6450 6815,6450 6815,6250 ; 7000,4450 7060,4390 7600,4390 7600,4450 7000,4450 ; 8290,1835 8415,1835 8415,2065 8290,2065 8290,1835 ; 8360,4475 8440,4475 8440,4750 8360,4750 8360,4475 ; 8555,2565 8700,2565 8700,2685 8555,2685 8555,2565 ; 8755,3685 8870,3685 8870,3775 8755,3775 8755,3685 ; 8850,3000 8925,3000 8925,3200 8850,3200 8850,3000 ; 8900,4385 8985,4300 9045,4300 9045,4455 8900,4455 8900,4385 ; 9150,3000 9300,3000 9300,3130 9150,3130 9150,3000 ; 10200,2550 10350,2550 10350,2650 10200,2650 10200,2550 ; 10450,3000 10550,3000 10550,3200 10450,3200 10450,3000 ; 10500,970 10645,970 10645,1130 10500,1130 10500,970 ; 10535,4385 10620,4300 10670,4300 10670,4445 10535,4445 10535,4385 ; 10580,1565 10580,1650 10855,1650 10855,1600 10765,1510 10695,1510 10640,1565 10580,1565 ; 10600,5950 10905,6255 11015,6255 11015,6115 10850,5950 10600,5950 ; 10750,3000 10750,3080 10800,3130 10950,3130 10950,3000 10750,3000 ; 10860,1245 11020,1245 11020,1440 10860,1440 10860,1245 ; 11050,4950 11050,5345 11300,5345 11300,5250 11600,5250 11600,4950 11050,4950 ; 11100,2350 11200,2350 11270,2420 11100,2420 11100,2350 ; 11135,5945 11280,5945 11280,6070 11135,6070 11135,5945 ; 11150,6550 11335,6735 11615,6735 11800,6550 11150,6550 ; 11450,2150 11650,2350 11700,2350 11700,2150 11450,2150 ; 11600,4550 11800,4750 12030,4750 11830,4550 11600,4550 ; 11850,2550 11950,2550 11950,2650 11850,2650 11850,2550 ; 12085,3000 12155,3000 12155,3200 12085,3200 12085,3000 ; 12150,4405 12150,4440 12300,4440 12300,4270 12225,4270 12225,4330 12150,4405 ; 12400,3000 12550,3000 12550,3150 12400,3150 12400,3000 ; 12750,2250 12950,2250 12950,2400 12750,2400 12750,2250 ; 12830,1200 12975,1200 13125,1350 12830,1350 12830,1200 ; 12830,1900 13160,1900 13160,2020 12830,2020 12830,1900 ; 12835,1550 13035,1550 13185,1700 12835,1700 12835,1550 ; 13125,3580 13280,3580 13280,3665 13190,3755 13125,3755 13125,3580 ; 13200,2300 13200,2350 13200,3300 13650,3300 13650,3100 13400,3100 13400,2500 13200,2300 ; 13235,4170 13435,4170 13435,4235 13320,4350 13235,4350 13235,4170
  lines w10: 6005,6420 6005,6550 6600,6550 6600,6420 6005,6420

## Other copper
Top Layer:
  text ".Layer_Name" at 15100,4785 h45 r90
Bottom Layer:
  text "PLAYWORLD" at 3045,6530 h100
  text "ELC0004  REV 3" at 3045,6400 h100
  text ".Layer_Name" at 15100,4785 h45 r90
Power (plane layer: these items are gaps in the copper):
  lines w8: 4300,1595 4300,850 4800,850 4800,910 4550,1160 4550,1600 4300,1600 ; 9875,4600 10195,4600 10195,4355 9985,4355 9985,4445 9875,4555 9875,4605 ; 1250,3550 1700,3550 1700,3900 1250,3900 1250,3550 ; 1650,4650 1650,4850 1850,5050 2150,5050 2250,4950 2250,4650 1650,4650 ; 1650,6000 2000,6350 1650,6350 1650,6000 ; 1900,1000 1900,1200 2100,1000 2200,1000 2200,860 2040,860 1900,1000 ; 1950,2180 2000,2180 2195,2180 2195,1935 1950,2180 ; 2060,2555 2210,2555 2210,2685 2060,2685 2060,2555 ; 2300,3635 2350,3585 2400,3585 2400,3700 2300,3700 2300,3635 ; 2340,3100 2440,3100 2440,3265 2340,3265 2340,3100 ; 2500,2090 2940,2090 3130,1900 3260,1900 2990,2170 2500,2170 2500,2090 ; 3100,4800 3300,4800 3500,4600 3845,4600 4000,4755 4000,5100 3100,5100 3100,4800 ; 3450,3580 3600,3580 3600,3640 3450,3640 3450,3580 ; 3700,2565 3835,2565 3835,2665 3700,2665 3700,2565 ; 3955,3100 4050,3100 4050,3245 3955,3245 3955,3100 ; 5000,4600 5500,4600 5500,4700 5000,4700 5000,4600 ; 5325,2555 5460,2555 5460,2660 5325,2660 5325,2555 ; 5500,3655 5600,3655 5620,3675 5620,3780 5500,3780 5500,3655 ; 5600,3100 5660,3100 5660,3190 5720,3250 5860,3250 5860,3300 5600,3300 5600,3100 ; 6005,6420 6005,6550 6600,6550 6600,6420 6005,6420 ; 6450,5800 6600,5800 6600,6150 6450,6150 6450,5800 ; 6815,6250 7700,6250 7700,6450 6815,6450 6815,6250 ; 7000,4450 7060,4390 7600,4390 7600,4450 7000,4450 ; 8290,1835 8415,1835 8415,2065 8290,2065 8290,1835 ; 8360,4475 8440,4475 8440,4750 8360,4750 8360,4475 ; 8555,2565 8700,2565 8700,2685 8555,2685 8555,2565 ; 8755,3685 8870,3685 8870,3775 8755,3775 8755,3685 ; 8850,3000 8925,3000 8925,3200 8850,3200 8850,3000 ; 8900,4385 8985,4300 9045,4300 9045,4455 8900,4455 8900,4385 ; 9150,3000 9300,3000 9300,3130 9150,3130 9150,3000 ; 10200,2550 10350,2550 10350,2650 10200,2650 10200,2550 ; 10450,3000 10550,3000 10550,3200 10450,3200 10450,3000 ; 10500,970 10645,970 10645,1130 10500,1130 10500,970 ; 10535,4385 10620,4300 10670,4300 10670,4445 10535,4445 10535,4385 ; 10580,1565 10580,1650 10855,1650 10855,1600 10765,1510 10695,1510 10640,1565 10580,1565 ; 10600,5950 10905,6255 11015,6255 11015,6115 10850,5950 10600,5950 ; 10750,3000 10750,3080 10800,3130 10950,3130 10950,3000 10750,3000 ; 10860,1245 11020,1245 11020,1440 10860,1440 10860,1245 ; 11050,4950 11050,5345 11300,5345 11300,5250 11600,5250 11600,4950 11050,4950 ; 11100,2350 11200,2350 11270,2420 11100,2420 11100,2350 ; 11135,5945 11280,5945 11280,6070 11135,6070 11135,5945 ; 11150,6550 11335,6735 11615,6735 11800,6550 11150,6550 ; 11450,2150 11650,2350 11700,2350 11700,2150 11450,2150 ; 11600,4550 11800,4750 12030,4750 11830,4550 11600,4550 ; 11850,2550 11950,2550 11950,2650 11850,2650 11850,2550 ; 12085,3000 12155,3000 12155,3200 12085,3200 12085,3000 ; 12150,4405 12150,4440 12300,4440 12300,4270 12225,4270 12225,4330 12150,4405 ; 12400,3000 12550,3000 12550,3150 12400,3150 12400,3000 ; 12750,2250 12950,2250 12950,2400 12750,2400 12750,2250 ; 12830,1200 12975,1200 13125,1350 12830,1350 12830,1200 ; 12830,1900 13160,1900 13160,2020 12830,2020 12830,1900 ; 12835,1550 13035,1550 13185,1700 12835,1700 12835,1550 ; 13125,3580 13280,3580 13280,3665 13190,3755 13125,3755 13125,3580 ; 13200,2300 13200,2350 13200,3300 13650,3300 13650,3100 13400,3100 13400,2500 13200,2300 ; 13235,4170 13435,4170 13435,4235 13320,4350 13235,4350 13235,4170
  lines w20: 1800,2300 1800,4700 6800,4700 6800,2300 1800,2300 ; 8200,2300 8200,4700 8600,4700 8600,4900 10300,4900 10300,4700 13200,4700 13200,2300 8200,2300
  text ".Layer_Name" at 15100,4785 h45 r90
Ground (plane layer: these items are gaps in the copper):
  lines w8: 4300,1595 4300,850 4800,850 4800,910 4550,1160 4550,1600 4300,1600 ; 9875,4600 10195,4600 10195,4355 9985,4355 9985,4445 9875,4555 9875,4605 ; 1250,3550 1700,3550 1700,3900 1250,3900 1250,3550 ; 1650,4650 1650,4850 1850,5050 2150,5050 2250,4950 2250,4650 1650,4650 ; 1650,6000 2000,6350 1650,6350 1650,6000 ; 1900,1000 1900,1200 2100,1000 2200,1000 2200,860 2040,860 1900,1000 ; 1950,2180 2000,2180 2195,2180 2195,1935 1950,2180 ; 2060,2555 2210,2555 2210,2685 2060,2685 2060,2555 ; 2300,3635 2350,3585 2400,3585 2400,3700 2300,3700 2300,3635 ; 2340,3100 2440,3100 2440,3265 2340,3265 2340,3100 ; 2500,2090 2940,2090 3130,1900 3260,1900 2990,2170 2500,2170 2500,2090 ; 3100,4800 3300,4800 3500,4600 3845,4600 4000,4755 4000,5100 3100,5100 3100,4800 ; 3450,3580 3600,3580 3600,3640 3450,3640 3450,3580 ; 3700,2565 3835,2565 3835,2665 3700,2665 3700,2565 ; 3955,3100 4050,3100 4050,3245 3955,3245 3955,3100 ; 5000,4600 5500,4600 5500,4700 5000,4700 5000,4600 ; 5325,2555 5460,2555 5460,2660 5325,2660 5325,2555 ; 5500,3655 5600,3655 5620,3675 5620,3780 5500,3780 5500,3655 ; 5600,3100 5660,3100 5660,3190 5720,3250 5860,3250 5860,3300 5600,3300 5600,3100 ; 6005,6420 6005,6550 6600,6550 6600,6420 6005,6420 ; 6450,5800 6600,5800 6600,6150 6450,6150 6450,5800 ; 6815,6250 7700,6250 7700,6450 6815,6450 6815,6250 ; 7000,4450 7060,4390 7600,4390 7600,4450 7000,4450 ; 8290,1835 8415,1835 8415,2065 8290,2065 8290,1835 ; 8360,4475 8440,4475 8440,4750 8360,4750 8360,4475 ; 8555,2565 8700,2565 8700,2685 8555,2685 8555,2565 ; 8755,3685 8870,3685 8870,3775 8755,3775 8755,3685 ; 8850,3000 8925,3000 8925,3200 8850,3200 8850,3000 ; 8900,4385 8985,4300 9045,4300 9045,4455 8900,4455 8900,4385 ; 9150,3000 9300,3000 9300,3130 9150,3130 9150,3000 ; 10200,2550 10350,2550 10350,2650 10200,2650 10200,2550 ; 10450,3000 10550,3000 10550,3200 10450,3200 10450,3000 ; 10500,970 10645,970 10645,1130 10500,1130 10500,970 ; 10535,4385 10620,4300 10670,4300 10670,4445 10535,4445 10535,4385 ; 10580,1565 10580,1650 10855,1650 10855,1600 10765,1510 10695,1510 10640,1565 10580,1565 ; 10600,5950 10905,6255 11015,6255 11015,6115 10850,5950 10600,5950 ; 10750,3000 10750,3080 10800,3130 10950,3130 10950,3000 10750,3000 ; 10860,1245 11020,1245 11020,1440 10860,1440 10860,1245 ; 11050,4950 11050,5345 11300,5345 11300,5250 11600,5250 11600,4950 11050,4950 ; 11100,2350 11200,2350 11270,2420 11100,2420 11100,2350 ; 11135,5945 11280,5945 11280,6070 11135,6070 11135,5945 ; 11150,6550 11335,6735 11615,6735 11800,6550 11150,6550 ; 11450,2150 11650,2350 11700,2350 11700,2150 11450,2150 ; 11600,4550 11800,4750 12030,4750 11830,4550 11600,4550 ; 11850,2550 11950,2550 11950,2650 11850,2650 11850,2550 ; 12085,3000 12155,3000 12155,3200 12085,3200 12085,3000 ; 12150,4405 12150,4440 12300,4440 12300,4270 12225,4270 12225,4330 12150,4405 ; 12400,3000 12550,3000 12550,3150 12400,3150 12400,3000 ; 12750,2250 12950,2250 12950,2400 12750,2400 12750,2250 ; 12830,1200 12975,1200 13125,1350 12830,1350 12830,1200 ; 12830,1900 13160,1900 13160,2020 12830,2020 12830,1900 ; 12835,1550 13035,1550 13185,1700 12835,1700 12835,1550 ; 13125,3580 13280,3580 13280,3665 13190,3755 13125,3755 13125,3580 ; 13200,2300 13200,2350 13200,3300 13650,3300 13650,3100 13400,3100 13400,2500 13200,2300 ; 13235,4170 13435,4170 13435,4235 13320,4350 13235,4350 13235,4170
  lines w20: 5800,0 5800,1095 7100,2395 7100,4605 ; 6400,0 6400,760 7905,2265 7905,4600
  text ".Layer_Name" at 15100,4785 h45 r90

## Silkscreen, mask and mechanical layers (free items; w line width, h text height)
Top Overlay:
  rectangle: 585,3590 695,3710
  text "J16" at 14060,5720 h60
  text "J12" at 815,5685 h60
  text ".Layer_Name" at 15100,4785 h45 r90
  text "Playworld" at 75,3780 h100
  text "ELC000" at 70,3600 h100
  text "Rev 3" at 805,3600 h100
  text "J17" at 810,2425 h60
  text "J11" at 14040,2420 h60
  text "CNH" at 6625,410 h60
  text "CNL" at 6835,410 h60
  text "SPK+" at 7015,410 h60
  text "GND" at 6225,405 h60
  text "V IN" at 6435,405 h60
  text "J19" at 9910,315 h60
  text "SPK-" at 7010,110 h60
Bottom Overlay:
  text ".Layer_Name" at 15100,4785 h45 r90
Top Paste:
  text ".Layer_Name" at 15100,4785 h45 r90
Bottom Paste:
  text ".Layer_Name" at 15100,4785 h45 r90
Top Solder:
  text ".Layer_Name" at 15100,4785 h45 r90
Bottom Solder:
  text ".Layer_Name" at 15100,4785 h45 r90
Drill Guide:
  text ".Layer_Name" at 15100,4785 h45 r90
Board Outline:
  the board outline again, w8
Dimensions:
  text ".Layer_Name" at 15100,4785 h45 r90
Cutouts:
  drawing of 253 lines, arcs and shapes, not listed
  text ".Layer_Name" at 15100,4785 h45 r90
Mechanical 4:
  text ".Layer_Name" at 15100,4785 h45 r90
Drill Drawing:
  lines w10: 15230,3027.75 16900,3027.75 ; 15230,3183.35 16900,3183.35 ; 15170,2300.42 ccw(c15220,2300.42) 15220,2250.42 16910,2250.42 ccw(c16910,2300.42) 16960,2300.42 16960,3360.42 ccw(c16910,3360.42) 16910,3410.42 15220,3410.42 ccw(c15220,3360.42) 15170,3360.42 15170,2300.42
  lines w12: 15295,1960 17395,1960
  text "American Products Inc.,  Playworld, Score Display  Board, Rev 3" at 1710,7065 h60
  text ".Layer_Name" at 15100,4785 h45 r90
  text ".Legend" at 15170,4070 h50
  text "Drill Table" at 15170,3950 h50
  text "Layer Stack Up Detail for: ELC0004" at 15230,3272.08 h36
  text "Layer" at 15230,3125.35 h36
  text "Copper" at 16150,3125.35 h36
  text "Name" at 15230,3053.35 h36
  text "Weight" at 16150,3053.35 h36
  text "Top Layer" at 15230,2915 h50
  text "1 oz" at 16150,2915 h50
  text "Ground" at 15240,2770 h50
  text "0.5 oz" at 16150,2770 h50
  text "Power" at 15250,2625 h50
  text "0.5 oz" at 16150,2625 h50
  text "Bottom Layer" at 15230,2480 h50
  text "1 oz" at 16150,2480 h50
  text "NOTES:  UNLESS OTHERWISE SPECIFIED" at 15370,2010 h62.5
  text "1." at 15170,1785 h50
  text "MAT'L: FR-406 OR EQUIVALENT ROHS COMPLIANT, .062 THK." at 15310,1785 h50
  text "2." at 15170,1660 h50
  text "TOP AND BOTTOM LAYER - 1 OZ COPPER AFTER PLATING." at 15310,1660 h50
  text "3." at 15170,1535 h50
  text "POWER AND GROUND LAYER - 0.5 OZ COPPER." at 15310,1535 h50
  text "4." at 15170,1410 h50
  text "FINISH: GOLD FLASH OVER ALL EXPOSED COPPER" at 15310,1410 h50
  text "5." at 15170,1285 h50
  text "ALL HOLES ARE PLATED THRU W/ MIN .001 (1 OZ) COPPER." at 15310,1285 h50
  text "6." at 15170,1160 h50
  text "ALL DIMENSIONS ARE FINISHED DIMENSIONS:" at 15310,1160 h50
  text ".XXX = +/- .005  .XX = +/- .01  HOLE DIA = +/- .003." at 15310,1035 h50
  text "7." at 15170,910 h50
  text "VENDOR'S UL APPROVAL MARK MUST BE ON BOARD, 94V-0." at 15310,910 h50
  text "WEEK & YEAR OF FABRICATION TO BE STAMPED ON BOARD." at 15310,785 h50
  text "8." at 15170,660 h50
  text "SOLDERMASK BOTH SIDES OF BOARD. L.P.I. OVER BARE COPPER, BLUE." at 15310,660 h50
  text "9." at 15170,535 h50
  text "SILKSCREEN COMP SIDE W/ WHITE EPOXY INK, OVER SOLDERMASK." at 15310,535 h50
  text "10." at 15170,410 h50
  text "LAYER STACK - TOP, GROUND, POWER, BOTTOM" at 15310,410 h50
  text "11." at 15170,285 h50
  text "RADIUS OF INSIDE CUTOUT - 50 MIL" at 15310,285 h50

## Dimensions
7500,6700 to 14600,6600 on Dimensions
400,6600 to 7500,6700 on Dimensions
0,6550 to 400,6600 on Dimensions
0,6550 to 15000,6550 on Dimensions
400,400 to 400,6600 on Dimensions
450,0 to 400,400 on Dimensions
450,0 to 450,7000 on Dimensions

## Text inside footprints (layer, text, board x,y; h text height)
J11: Bottom Overlay "1" at 14290,665 h50 r180
J12: Bottom Overlay "1" at 683.34,6330 h50
J16: Bottom Overlay "1" at 14860,4720 h50 r180
J17: Bottom Overlay "1" at 130,2280 h50
J18: Top Overlay "20" at 8190,6795 h50 r180; Top Overlay "1" at 10240,6795 h50 r180
J19: Bottom Overlay "1" at 9820,-50 h50 r90